# Altium PCB IO_PCB.PcbDoc
Units mm, origin at the board's own origin, x right, y up, seen from the top; angles counter-clockwise.
Board outline 48 x 50.95 mm, 2 copper layers (Top Layer, Bottom Layer); 47 components, 59 nets, 239 pads, 29 vias.
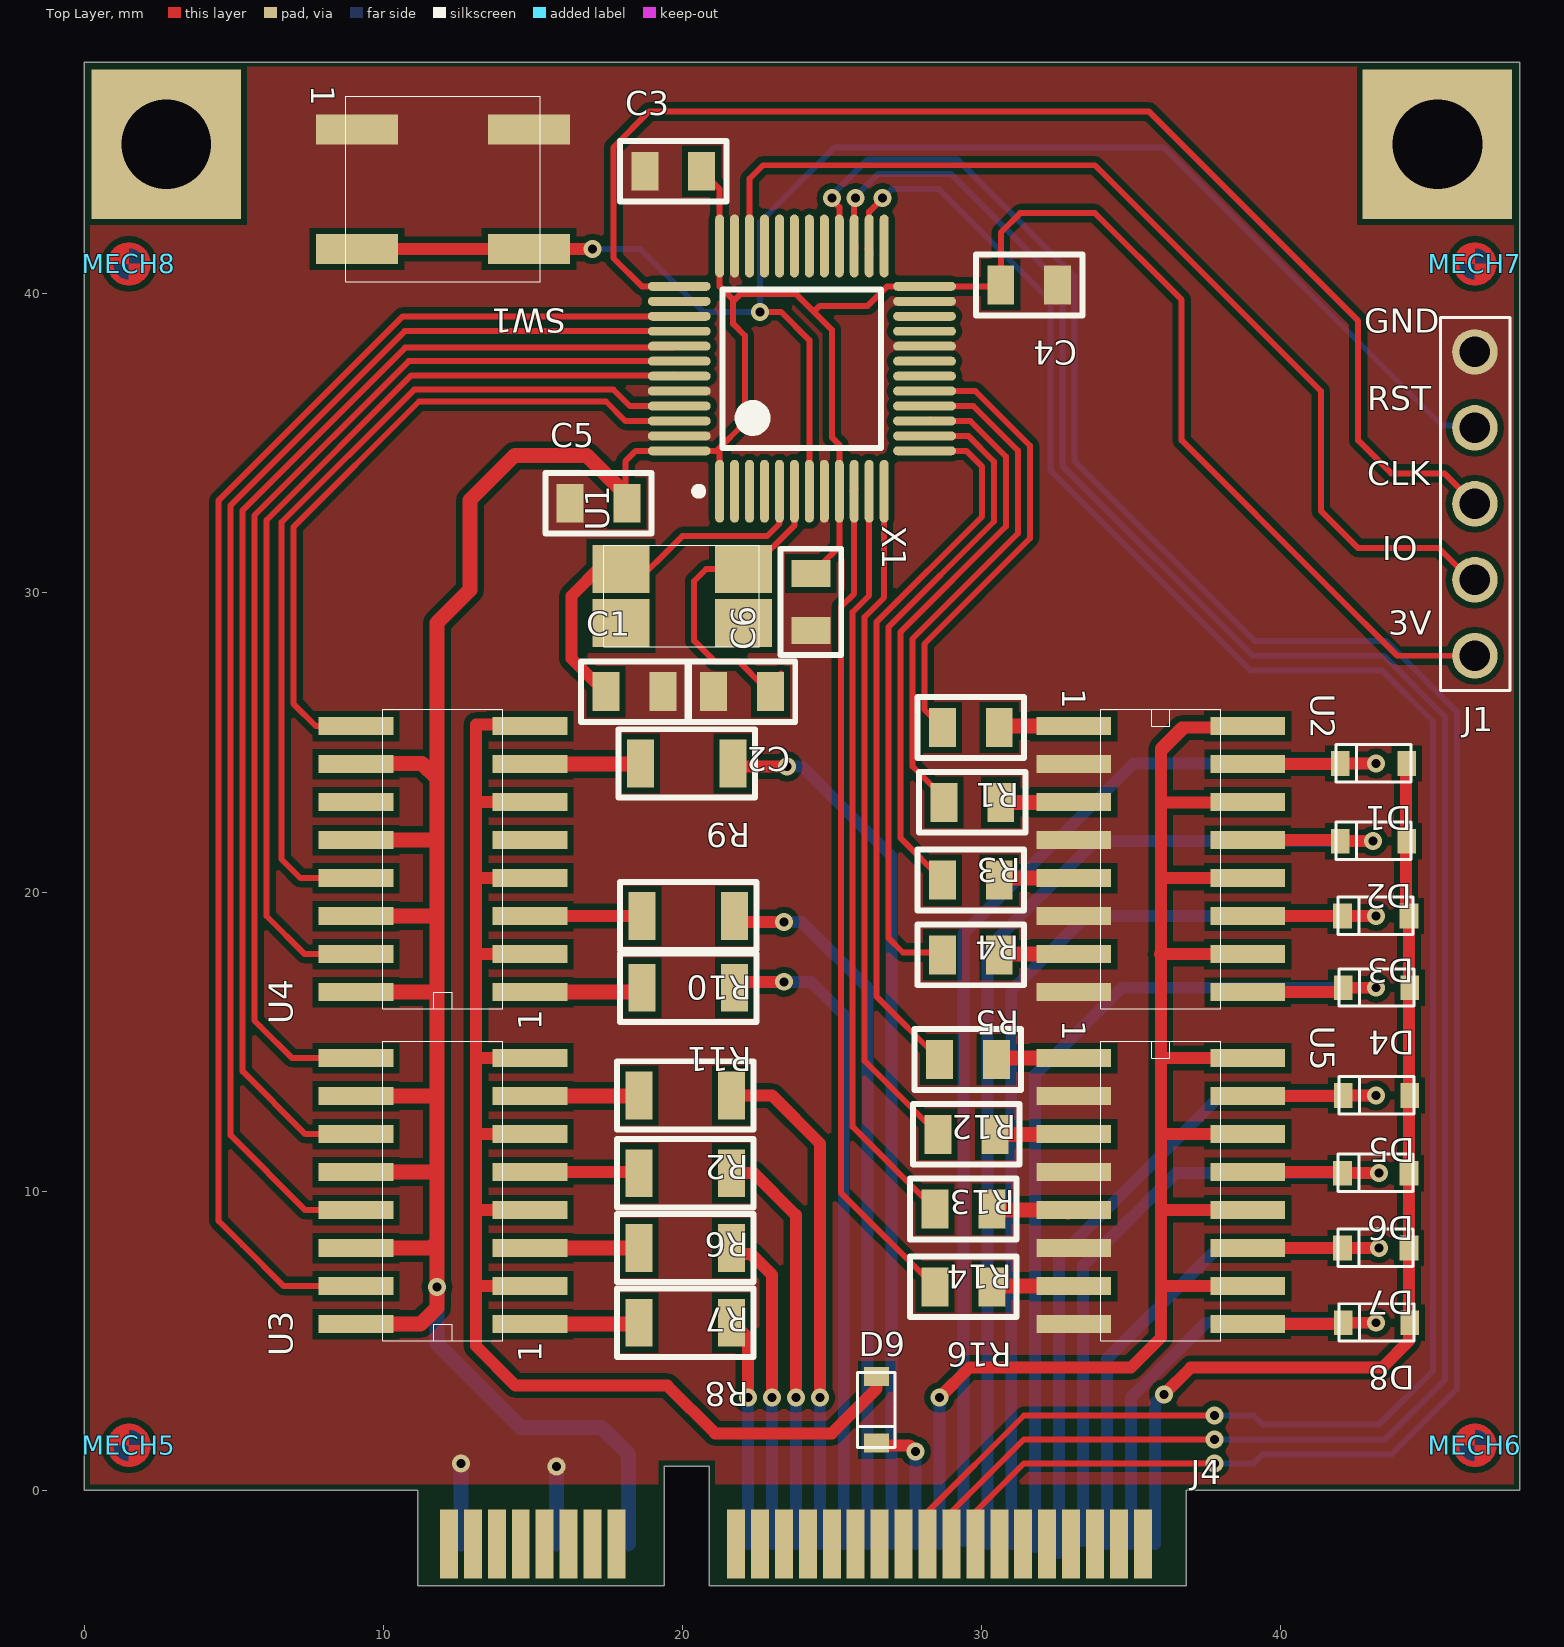
[diagram p0: Top Layer view]
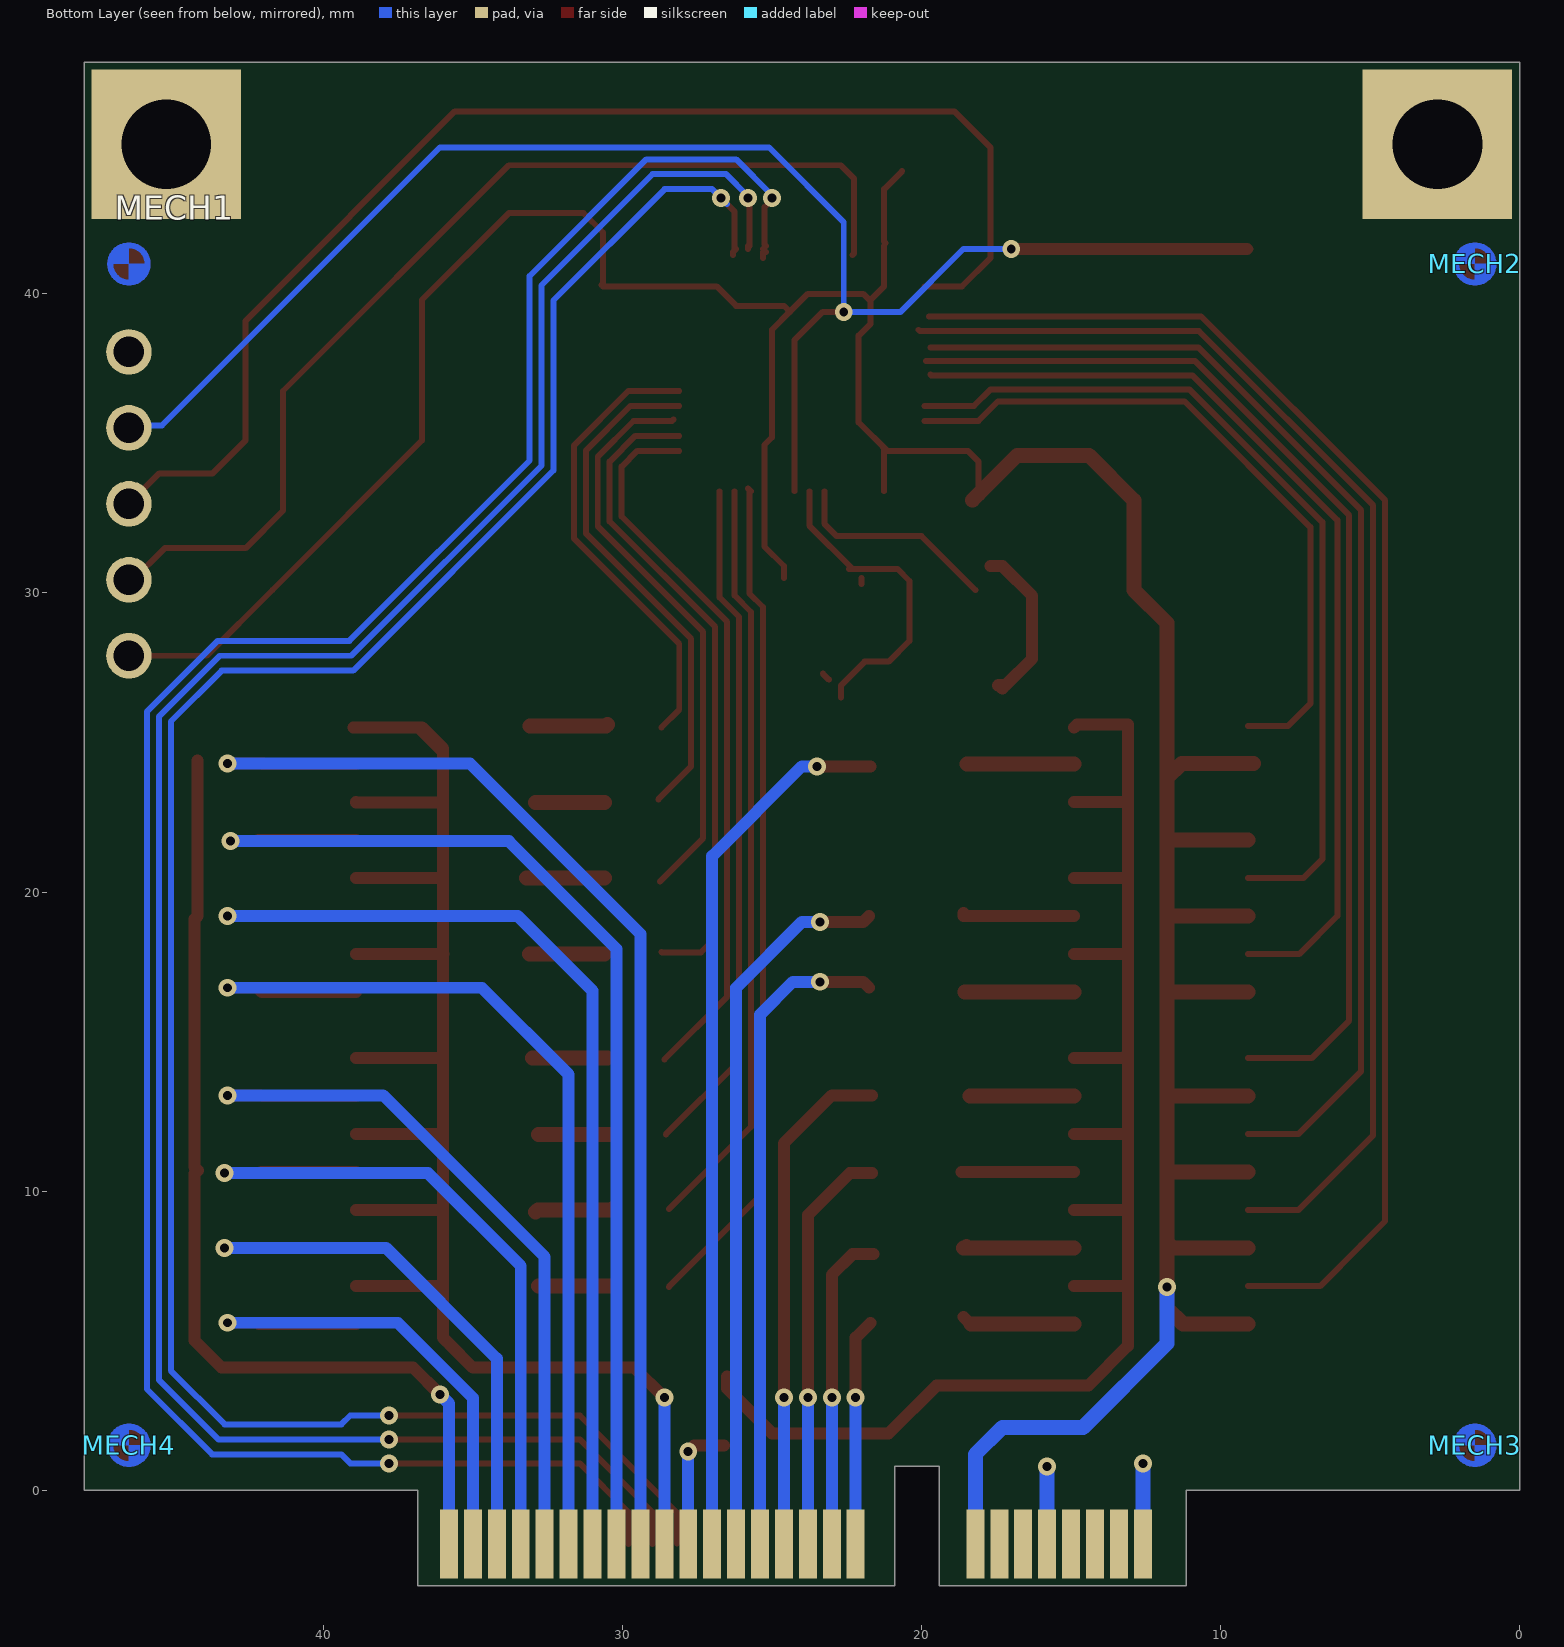
[diagram p1: Bottom Layer view, seen from below]
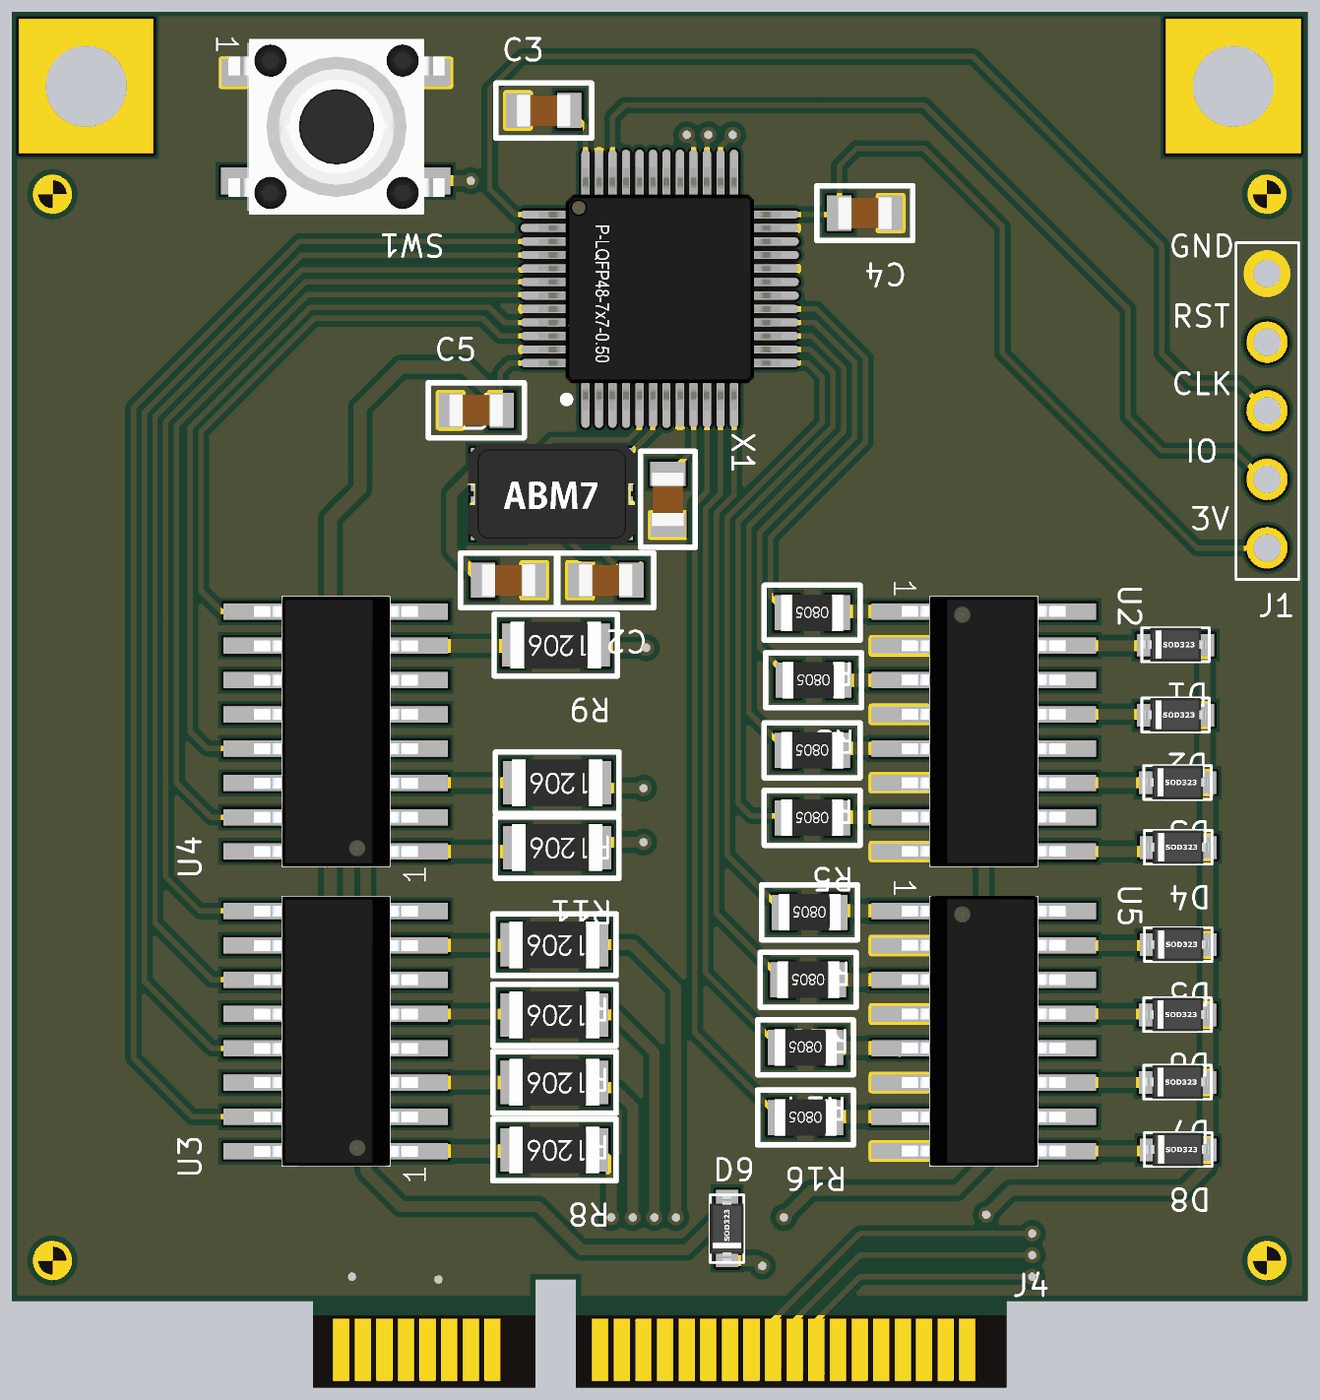
[diagram p2: 3D render of the assembled board from above, using the file's embedded part models]

## Layer stack, top to bottom
Top Solder: solder mask 0.0102, Solder Resist, Dk 3.5
Top Layer: signal copper 0.0356
Dielectric 1: dielectric 0.32, FR-4, Dk 4.8
Bottom Layer: signal copper 0.0356
Bottom Solder: solder mask 0.0102, Solder Resist, Dk 3.5

## Board outline
11.15,-3.2 11.15,0 0,0 0,47.75 48,47.75 48,0 36.85,0 36.85,-3.2 20.9,-3.2 20.9,0.8 19.4,0.8 19.4,-3.2

## Design rules (kind name [scope] priority, off if disabled: settings)
Clearance [All] p1: gap=0.2 ignorepadtopadclearanceinfootprint=FALSE except(0: Arc-Hole Track-Hole SMDPad-Hole THPad-Hole Via-Hole Fill-Hole Poly-Hole Region-Hole Text-Hole)
HoleToHoleClearance [All] p1: gap=0.1 allowstackedmicrovias=TRUE
MinimumSolderMaskSliver [All] p1: minsoldermaskwidth=0.1
PolygonConnect [All] p1: connectstyle=Direct reliefconductorwidth=0.5 reliefentries=4 polygonreliefangle="90 Angle" airgapwidth=0.3
RoutingVias [All] p1: holewidth=0.3 width=0.6 viastyle="Through Hole" minholewidth=0.3 minwidth=0.6 maxholewidth=0.3 maxwidth=0.6
SilkToSilkClearance [All] p1: silktosilkclearance=0.1
SilkToSolderMaskClearance [IsPad] p1: minsilkscreentomaskgap=0.1 clearancetoexposedcopper=TRUE
SolderMaskExpansion [All] p1: expansion=0.102 istentingtop=FALSE
Width [All] p1: maxlimit=2 minlimit=0.2 preferedwidth=0.2
26 further rules are at their usual default settings.

## Classes and differential pairs
net class Undefined: 3V3 24V_IO_1 DIG_IN_1 DIG_IN_2 DIG_IN_3 DIG_IN_4 DIG_IN_5 DIG_IN_6 DIG_IN_7 DIG_OUT_1 DIG_OUT_2 DIG_OUT_3 DIG_OUT_4 DIG_OUT_5 DIG_OUT_6 DIG_OUT_7 DIG_OUT_8 GND GND_IO_1 GND_OUT GP_1 GP_2 GP_3 GP_4 GP_5 GP_6 GP_7 GPO_1 GPO_2 GPO_3 GPO_4 GPO_5 GPO_6 GPO_7 GPO_8 NetR1_1 NetR2_2 NetR3_1 NetR4_1 NetR5_1 NetR6_2 NetR7_2 NetR8_2 NetR9_1 NetR9_2 NetR10_2 NetR11_2 NetR12_1 NetR13_1 NetR14_1 NetR16_1 NetU4_5 NetU4_11
net class SWD: GND SWCLK SWDIO
component class "[01] - CPU": C1 C2 C3 C4 C5 C6 J1 MECH1 MECH2 MECH3 MECH4 MECH5 MECH6 MECH7 MECH8 SW1 U1 X1
component class "[02] - IO": D1 D2 D3 D4 D5 D6 D7 D8 R1 R2 R3 R4 R5 R6 R7 R8 R9 R10 R11 R12 R13 R14 R16 U2 U3 U4 U5
component class "[03] - miniPCI": D9 J4
net class stm_gpio: GP_1 GP_2 GP_3 GP_4 GP_5 GP_6 GP_7 GPO_1 GPO_2 GPO_3 GPO_4 GPO_5 GPO_6 GPO_7 GPO_8

## Components (designator, comment, footprint, x,y, rotation, side; value= is the part's Value field where it differs from the comment)
C1 "18PF" C0805 18.4,26.7 r0 top
C2 "18PF" C0805 22,26.7 r180 top
C3 "4.7µF" C0805 19.7,44.1 r0 top
C4 "10nF" C0805 31.6,40.3 r180 top
C5 "10nF" C0805 17.2,33 r0 top
C6 "10nF" C0805 24.3,29.7 r90 top
D1 "D-1N4148WS" SOD-323 44.225,24.3 r180 top
D2 "D-1N4148WS" SOD-323 44.225,21.7 r180 top
D3 "D-1N4148WS" SOD-323 44.3,19.2 r180 top
D4 "D-1N4148WS" SOD-323 44.325,16.8 r180 top
D5 "D-1N4148WS" SOD-323 44.325,13.2 r180 top
D6 "D-1N4148WS" SOD-323 44.3,10.6 r180 top
D7 "D-1N4148WS" SOD-323 44.3,8.1 r180 top
D8 "D-1N4148WS" SOD-323 44.325,5.6 r180 top
D9 "D-1N4148WS" SOD-323 26.5,3.8 r270 top
J1 "Header" "HEADER 1X5 2.54MM" 46.5,38.06 r270 top
J4 "MINIPCIe" "MINI PCIe" 9,-3.2 r0 top locked
MECH1 "MECH-Fidicuals" T-Fidicuals 46.5,41 r90 bottom
MECH2 "MECH-Fidicuals" T-Fidicuals 1.5,41 r90 bottom
MECH3 "MECH-Fidicuals" T-Fidicuals 1.5,1.5 r90 bottom
MECH4 "MECH-Fidicuals" T-Fidicuals 46.5,1.5 r90 bottom
MECH5 "MECH-Fidicuals" T-Fidicuals 1.5,1.5 r90 top
MECH6 "MECH-Fidicuals" T-Fidicuals 46.5,1.5 r90 top
MECH7 "MECH-Fidicuals" T-Fidicuals 46.5,41 r90 top
MECH8 "MECH-Fidicuals" T-Fidicuals 1.5,41 r90 top
R1 "270R" R0805 29.65,25.5 r180 top
R2 "RES SMD 5.1K" R1206 20.1,13.2 r180 top
R3 "270R" R0805 29.7,23 r180 top
R4 "270R" R0805 29.65,20.4 r180 top
R5 "270R" R0805 29.65,17.9 r180 top
R6 "RES SMD 5.1K" R1206 20.1,10.6 r180 top
R7 "RES SMD 5.1K" R1206 20.1,8.1 r180 top
R8 "RES SMD 5.1K" R1206 20.1,5.6 r180 top
R9 "RES SMD 5.1K" R1206 20.15,24.3 r180 top
R10 "RES SMD 5.1K" R1206 20.2,19.2 r180 top
R11 "RES SMD 5.1K" R1206 20.2,16.8 r180 top
R12 "270R" R0805 29.55,14.4 r180 top
R13 "270R" R0805 29.5,11.9 r180 top
R14 "270R" R0805 29.4,9.4 r180 top
R16 "270R" R0805 29.4,6.8 r180 top
SW1 "Switch_Pushbutton_smd" SW_B3SL-1022P 12,43.5 r180 top
U1 "IC-MC-STM32F101C8T6TR" STM-LQFP48_M 24,37.5 r90 top
U2 "PS2801C-4-F3-A" "U_16_D LONG" 36,21.1 r270 top
U3 "PS2801C-4-F3-A" "U_16_D LONG" 12,10 r90 top
U4 "PS2801C-4-F3-A" "U_16_D LONG" 12,21.1 r90 top
U5 "PS2801C-4-F3-A" "U_16_D LONG" 36,10 r270 top
X1 "ABM7-8.000MHZ" sm_osc_mixed 20,29.9 r0 top

## Footprints (in the part's own frame and the unit in brackets; to place one, negate y for a bottom-side part, rotate by r counter-clockwise, add the part's x,y. Pads: shape width x height; smd on the part's side, far side on the other; paste and mask are expansions set on the pad)
C0805 [mm]
  rect 0.9x1.3 smd: 1(-0.95,0) 2(0.95,0)
  silkscreen extent -1.78,-1.02 1.78,1.02, body extent -1,-0.6 1,0.6, height 0.95
"HEADER 1X5 2.54MM" [mil]
  round 60 hole 40: 1(0,0) 2(100,0) 3(200,0) 4(300,0) 5(400,0)
  silkscreen extent -45,-45 446,46
"MINI PCIe" [mm]
  rect 0.6x2.3 smd paste-0.9: 1(3.2,1.4) 3(4,1.4) 5(4.8,1.4) 7(5.6,1.4) 9(6.4,1.4) 11(7.2,1.4) 13(8,1.4) 15(8.8,1.4) 17(12.8,1.4) 19(13.6,1.4) 21(14.4,1.4) 23(15.2,1.4) 25(16,1.4) 27(16.8,1.4) 29(17.6,1.4) 31(18.4,1.4) 33(19.2,1.4) 35(20,1.4) 37(20.8,1.4) 39(21.6,1.4) 41(22.4,1.4) 43(23.2,1.4) 45(24,1.4) 47(24.8,1.4) 49(25.6,1.4) 51(26.4,1.4)
  rect 0.6x2.3 smd far side paste-0.9: 2(3.6,1.4) 4(4.4,1.4) 6(5.2,1.4) 8(6,1.4) 10(6.8,1.4) 12(7.6,1.4) 14(8.4,1.4) 16(9.2,1.4) 18(13.2,1.4) 20(14,1.4) 22(14.8,1.4) 24(15.6,1.4) 26(16.4,1.4) 28(17.2,1.4) 30(18,1.4) 32(18.8,1.4) 34(19.6,1.4) 36(20.4,1.4) 38(21.2,1.4) 40(22,1.4) 42(22.8,1.4) 44(23.6,1.4) 46(24.4,1.4) 48(25.2,1.4) 50(26,1.4) 52(26.8,1.4)
R0805 [mm]
  rect 0.9x1.3 smd: 1(-0.95,0) 2(0.95,0)
  silkscreen extent -1.78,-1.02 1.78,1.02, body extent -1.15,-0.67 1.15,0.68, height 0.76
R1206 [mm]
  rect 0.9x1.6 smd: 1(-1.55,0) 2(1.55,0)
  silkscreen extent -2.29,-1.14 2.29,1.14, body extent -1.67,-0.86 1.68,0.87, height 0.85
sm_osc_mixed [mm]
  rect 1.9x1.6 smd: 1(-2.05,0.9) 2(2.05,0.9) 3(2.05,-0.9) 4(-2.05,-0.9)
  silkscreen extent -2.62,-1.7 2.58,1.7, body extent -3.1,-1.85 3.1,1.85, height 1.44
SOD-323 [mm]
  rect 0.63x0.83 smd: 1(2.225,0) 2(0,0)
  silkscreen extent -0.13,-0.64 2.37,0.62, body extent -0.13,-0.64 2.37,0.61, height 0.9
STM-LQFP48_M [mm] "QFP, 48-Leads, Body 7x7mm, Pitch 0.5mm, IPC Low Density"
  oval 2.1x0.3 smd mask+0.1: 1(-4.1,2.75) 2(-4.1,2.25) 3(-4.1,1.75) 4(-4.1,1.25) 5(-4.1,0.75) 6(-4.1,0.25) 7(-4.1,-0.25) 8(-4.1,-0.75) 9(-4.1,-1.25) 10(-4.1,-1.75) 11(-4.1,-2.25) 12(-4.1,-2.75) 25(4.1,-2.75) 26(4.1,-2.25) 27(4.1,-1.75) 28(4.1,-1.25) 29(4.1,-0.75) 30(4.1,-0.25) 31(4.1,0.25) 32(4.1,0.75) 33(4.1,1.25) 34(4.1,1.75) 35(4.1,2.25) 36(4.1,2.75)
  oval 0.3x2.1 smd mask+0.1: 13(-2.75,-4.1) 14(-2.25,-4.1) 15(-1.75,-4.1) 16(-1.25,-4.1) 17(-0.75,-4.1) 18(-0.25,-4.1) 19(0.25,-4.1) 20(0.75,-4.1) 21(1.25,-4.1) 22(1.75,-4.1) 23(2.25,-4.1) 24(2.75,-4.1) 37(2.75,4.1) 38(2.25,4.1) 39(1.75,4.1) 40(1.25,4.1) 41(0.75,4.1) 42(0.25,4.1) 43(-0.25,4.1) 44(-0.75,4.1) 45(-1.25,4.1) 46(-1.75,4.1) 47(-2.25,4.1) 48(-2.75,4.1)
  silkscreen extent -4.22,-2.65 2.65,3.57, body extent -4.5,-4.5 4.5,4.5, height 1.5
SW_B3SL-1022P [mm] "SW_B3SL-1022P"
  rect 2.75x1 smd: 1(2.875,-2) 2(-2.875,-2) 3(2.875,2) 4(-2.875,2)
  silkscreen extent -3.25,-3.1 3.25,3.1, body extent -4.02,-3.25 3.98,3.25, height 7
T-Fidicuals [mm] "Fidicuals"
  Top Layer region: 0,-0.625 -0.375,-0.5 -0.625,-0.25 -0.625,0 0,0
  Top Layer region: 0.625,0 0,0 0,0.625 0.375,0.5 0.625,0.25
  Top Layer lines w0.203: 0,-0.625 ccw(c0,0) 0,0.625 ccw(c0,0) 0,-0.625
"U_16_D LONG" [mm] "U_16_D"
  rect 0.6x2.5 smd: 1(-4.445,-2.908) 2(-3.175,-2.908) 3(-1.905,-2.908) 4(-0.635,-2.908) 5(0.635,-2.908) 6(1.905,-2.908) 7(3.175,-2.908) 8(4.445,-2.908) 9(4.445,2.908) 10(3.175,2.908) 11(1.905,2.908) 12(0.635,2.908) 13(-0.635,2.908) 14(-1.905,2.908) 15(-3.175,2.908) 16(-4.445,2.908)
  silkscreen extent -5,-2.01 5,2.01, body extent -5,-3.04 5,3.04, height 1.65

## Part data
C1 C2: library part C-18PF,50V,0805, "MULTICOMP - MC0805N180J500CT - CAP, MLCC, C0G/NP0, 18PF, 50V,0805, REEL"
C3: library part C-4.7UF,16V,0805, "AVX - 0805YC475KAT2A - CAP, MLCC, X7R, 4.7UF, 16V, 0805"
C4 C5 C6: library part C-10NF,16V,0805, "CAP CER 10000PF 16V NP0 0805"
D1 D2 D3 D4 D5 D6 D7 D8 D9: "DIODES INC. - 1N4148WS-7-F - DIODE, SS SWITCH, 75V, 0.2W, SOD323"
J1: library part "CON-Header 1X5 2.54MM", "Header 1X5 2.54"
MECH1 MECH2 MECH3 MECH4 MECH5 MECH6 MECH7 MECH8: "Fidicuals"
R1 R3 R4 R5 R12 R13 R14 R16: library part R-270R,0805, "TE CONNECTIVITY / NEOHM 270R Thin Film"
R2 R6 R7 R8 R9 R10 R11: library part R-5.1K,1206, "RES SMD 5.11K OHM 1% 1/2W 1206"
SW1: "Switch Push Button tactile"
U1: "IC MCU 32BIT 64KB FLASH 48LQFP"
U2 U3 U4 U5: "NEC - PS2801C-4-F3-A - OPTOCOUPLER, 4X TR O/P, SSOP-16"
X1: library part OSC-ABM7-8.000MHZ-D2Y-T, "CRYSTAL 8.0000MHZ 18PF SMD"

## Free pads (board coordinates)
  rect 5x5 hole 3 unplated: MH1(2.75,45) MH2(45.25,45)

## Via types
v1: diameter 0.6, hole 0.3, Top Layer to Bottom Layer, tented both sides, 29 vias

## Nets (pads, with @x,y where several pads share a name; then routed paths per layer and width w, separated by ;. In a path a pad name is that pad's centre, name@x,y a point inside that pad or via, vN(x,y) a via of type N, cw(c..) or ccw(c..) an arc to the next point about the centre after c; other vN are vias at no path point)
3V3: C3.2 C4.2 C5.2 C6.2 J1.5 J4.16 U1.1 U1.9 U1.24 U1.36 U1.48 U3.10 U3.12 U3.14 U3.16 U4.10 U4.12 U4.14 U4.16 | length 131.2
  Top Layer w0.2: C5.2@18.1,33.3 18.1,34.4 18.45,34.75 U1.48 21.15,34.75 22.1,35.7 22.1,38.6 21.7,39 21.7,39.75 21.95,40 23.8,40 24.4,39.4 ; C3.2 21.25,43.5 21.25,41.75 U1.36@21.2,41.7 ; U1.1 21.25,34.85 21.3,34.9 ; U1.36 21.25,40.25 21.7,39.8 ; C6.2@24.6,30.5 24.6,30.9 25.25,31.55 U1.9 25.25,34.951 25,35.201 25,38.8 24.4,39.4 ; C4.2 30.65,42.05 31.3,42.7 33.8,42.7 36.7,39.8 36.7,35.1 41.7,30.1 43.9,27.9 J1.5 ; C4.2@30.7,40.3 30.65,40.25 U1.24 26.85,40.25 26.2,39.6 24.6,39.6 24.4,39.4
  Top Layer w0.5: U4.10@8.9,24.3 11.3,24.3 11.8,23.8 ; U3.16 11.255,5.555 11.8,6.1 v1(11.8,6.8) 11.8,10.6 ; U3.14 11.595,8.095 11.7,8.2 ; U3.12 11.765,10.635 11.8,10.6 ; U3.10 11.8,13.175 ; U4.16 11.8,16.655 ; U4.14 11.705,19.195 11.8,19.1 ; U4.12 11.665,21.735 11.7,21.7 ; C5.2@18.3,33.1 18.1,33.3 16.8,34.6 14.4,34.6 12.9,33.1 12.9,30.1 11.8,29 11.8,23.8 ; 11.8,10.6 11.8,13.175 ; 11.8,13.175 11.8,16.655 ; 11.8,16.655 11.8,19.1 ; 11.8,19.1 11.8,23.8
  Bottom Layer w0.5: v1(11.8,6.8) 11.8,4.9 14.6,2.1 17.3,2.1 18.2,1.2 J4.16
24V_IO_1: J4.34 U2.10 U2.12 U2.14 U2.16 U5.10 U5.12 U5.14 U5.16 | length 57.6
  Top Layer w0.4: v1(28.6,3.1) 29.6,4.1 35,4.1 35.8,4.9 ; 35.85,4.95 36,5.1 36,6.7 ; 35.975,17.925 36,17.925 ; 36.055,14.445 U5.16 ; 36.75,25.45 36,24.7 ; U5.10 36.125,6.825 36,6.7 ; U5.12 36.135,9.365 36,9.5 ; U5.14 36.005,11.905 36,11.9 ; U2.10 36,17.925 ; U2.12 36.065,20.465 36,20.4 ; U2.14 38.903,23 36,23 ; U2.16@39,25.5 36.7,25.5 36,24.8 36,24.7 ; 36,6.7 36,9.5 ; 36,9.5 36,11.9 ; 36,11.9 36,17.925 ; 36,17.925 36,20.4 ; 36,20.4 36,23 ; 36,23 36,24.7
  Bottom Layer w0.4: J4.34 v1(28.6,3.1)
DIG_IN_1: J4.18 R8.1 | length 7.5
  Top Layer w0.4: R8.1@21.7,5.6 22.2,5.1 v1(22.2,3.1)
  Bottom Layer w0.4: J4.18 v1@22.2,3
DIG_IN_2: J4.20 R7.1 | length 10.6
  Top Layer w0.4: R7.1@21.6,7.9 22.3,7.9 23,7.2 v1(23,3.1)
  Bottom Layer w0.4: J4.20 v1@23,3
DIG_IN_3: J4.22 R6.1 | length 13.7
  Top Layer w0.4: R6.1 22.4,10.6 23.8,9.2 v1(23.8,3.1)
  Bottom Layer w0.4: J4.22 v1(23.8,3.1)
DIG_IN_4: J4.24 R2.1 | length 16.9
  Top Layer w0.4: R2.1 23,13.2 24.6,11.6 v1(24.6,3.1)
  Bottom Layer w0.4: J4.24 v1@24.6,3
DIG_IN_5: J4.26 R11.1 | length 21.9
  Top Layer w0.4: R11.1 21.95,17 v1(23.4,17)
  Bottom Layer w0.4: v1(23.4,17) 24.3,17 25.4,15.9 25.4,14.7 J4.26
DIG_IN_6: J4.28 R10.1 | length 24
  Top Layer w0.4: R10.1 21.95,19 v1(23.4,19)
  Bottom Layer w0.4: v1(23.4,19) 24,19 26.2,16.8 J4.28
DIG_IN_7: J4.30 R9.1 | length 29.5
  Top Layer w0.4: R9.1@21.7,24.2 v1(23.5,24.2)
  Bottom Layer w0.4: v1(23.5,24.2) 24,24.2 27,21.2 J4.30
DIG_OUT_1: D1.1 J4.36 U2.15 | length 40.8
  Top Layer w0.4: U2.15 D1.1@41.975,24.275 ; D1.1@42.025,24.275 D1.1@41.975,24.275 ; v1(43.2,24.3) D1.1 D1.1@41.975,24.275
  Bottom Layer w0.4: J4.36@29.4,-1.7 29.4,18.6 35.1,24.3 v1(43.2,24.3)
DIG_OUT_2: D2.1 J4.38 U2.13 | length 38.6
  Top Layer w0.4: U2.13 D2.1@42.165,21.735 ; D2.1 v1(43.1,21.7)
  Bottom Layer w0.4: J4.38 30.2,18.1 33.8,21.7 v1(43.1,21.7)
DIG_OUT_3: D3.1 J4.40 U2.11 | length 36
  Top Layer w0.4: U2.11 D3.1@42.095,19.195 ; D3.1 v1(43.2,19.2)
  Bottom Layer w0.4: J4.40 31,16.7 33.5,19.2 v1(43.2,19.2)
DIG_OUT_4: D4.1 J4.42 U2.9 | length 32.8
  Top Layer w0.4: U2.9 42.055,16.655 42.2,16.8 v1(43.2,16.8)
  Bottom Layer w0.4: J4.42@31.8,-1.9 31.8,13.9 34.7,16.8 v1(43.2,16.8)
DIG_OUT_5: D5.1 J4.44 U5.15 | length 27
  Top Layer w0.4: U5.15 D5.1@42.025,13.175 ; D5.1 v1(43.2,13.2)
  Bottom Layer w0.4: J4.44@32.6,-2.1 32.6,7.8 38,13.2 v1(43.2,13.2)
DIG_OUT_6: D6.1 J4.46 U5.13 | length 24.8
  Top Layer w0.4: U5.13 D6.1@42.065,10.635 ; D6.1 v1(43.3,10.6)
  Bottom Layer w0.4: J4.46@33.4,-1.7 33.4,7.5 36.5,10.6 v1(43.3,10.6)
DIG_OUT_7: D7.1 J4.48 U5.11 | length 21.1
  Top Layer w0.4: U5.11 D7.1@41.995,8.095 ; D7.1 v1(43.3,8.1)
  Bottom Layer w0.4: J4.48 34.2,4.4 37.9,8.1 v1(43.3,8.1)
DIG_OUT_8: D8.1 J4.50 U5.9 | length 18.5
  Top Layer w0.4: U5.9 D8.1@42.145,5.555 ; D8.1 v1(43.2,5.6)
  Bottom Layer w0.4: J4.50 35,3.09 37.51,5.6 v1(43.2,5.6)
GND: C1.2 C2.2 C3.1 C4.1 C5.1 C6.1 J1.1 J4.2 J4.10 SW1.1 SW1.2 U1.8 U1.20 U1.23 U1.35 U1.44 U1.47 U2.2 U2.4 U2.6 U2.8 U5.2 U5.4 U5.6 U5.8 | length 5.3
  Bottom Layer w0.5: J4.2 v1(12.6,0.9) ; J4.10 v1(15.8,0.8)
GND_IO_1: D9.2 U3.2 U3.4 U3.6 U3.8 U4.2 U4.4 U4.6 U4.8 | length 51
  Top Layer w0.4: 13.205,23.005 U4.6 ; U4.8@14.9,25.5 14.8,25.6 13.1,25.6 13.1,20.4 ; U3.2 13.225,6.825 13.1,6.7 ; U3.4 13.165,9.365 13.1,9.3 ; U3.6 13.205,11.905 13.1,11.8 ; U3.8 13.255,14.445 13.1,14.6 ; U4.2 13.125,17.925 13.1,17.9 ; U4.4 13.165,20.465 13.1,20.4 ; D9.2 26.5,3.4 25,1.9 21.1,1.9 19.5,3.5 14.425,3.5 13.1,4.825 13.1,6.7 ; 13.1,6.7 13.1,9.3 ; 13.1,9.3 13.1,11.8 ; 13.1,11.8 13.1,14.6 ; 13.1,14.6 13.1,17.9 ; 13.1,17.9 13.1,20.4
GND_OUT: D1.2 D2.2 D3.2 D4.2 D5.2 D6.2 D7.2 D8.2 J4.52 | length 33.6
  Top Layer w0.4: v1(36.1,3.2) 37,4.1 43.4,4.1 44.3,5 D7.2 44.3,10.59 44.195,10.695 44.3,10.8 44.3,16.8 44.3,19.1 44.2,19.2 D1.2@44.2,24.4
  Bottom Layer w0.4: J4.52 35.8,2.9 v1(36.1,3.2)
GP_1: U1.39 U3.15 | length 47.4
  Top Layer w0.2: U3.15 6.675,6.825 5.3,8.2 4.5,9 4.5,33.094 10.656,39.25 U1.39@19.75,39.25
GP_2: U1.40 U3.13 | length 43.9
  Top Layer w0.2: U3.13 7.401,9.365 4.9,11.866 4.9,32.928 10.722,38.75 U1.40 20.05,38.75 U1.40@20.1,38.8
GP_3: U1.41 U3.11 | length 40.1
  Top Layer w0.2: U3.11 7.401,11.905 5.3,14.006 5.3,32.763 10.737,38.2 U1.41@19.7,38.2
GP_4: U1.42 U3.9 | length 37.1
  Top Layer w0.2: U3.9 6.955,14.445 5.9,15.5 5.7,15.7 5.7,32.597 10.853,37.75 U1.42@19.85,37.75
GP_5: U1.43 U4.15 | length 32.4
  Top Layer w0.2: U4.15 7.375,17.925 6.1,19.2 6.1,32.431 10.944,37.275 19.675,37.275 U1.43@19.7,37.3
GP_6: U1.45 U4.13 | length 29.4
  Top Layer w0.2: U4.13 7.235,20.465 6.6,21.1 6.6,21.3 6.6,32.366 11.034,36.8 17.7,36.8 18.25,36.25 U1.45
GP_7: U1.46 U4.9 | length 23.2
  Top Layer w0.2: U4.9 7.755,25.545 7,26.3 7,32.2 11.2,36.4 17.45,36.4 18.1,35.75 U1.46
GPO_1: R1.2 U1.17 | length 15.4
  Top Layer w0.2: U1.17 29.8,36.75 31.625,34.925 31.625,31.825 28.1,28.3 28.1,26.1 R1.2
GPO_2: R3.2 U1.16 | length 17.3
  Top Layer w0.2: U1.16 29.734,36.25 31.225,34.759 31.225,31.991 27.7,28.466 27.7,24.2 R3.2@28.8,23.1
GPO_3: R4.2 U1.15 | length 19.3
  Top Layer w0.2: U1.15@28.3,35.8 28.35,35.75 29.631,35.75 30.825,34.556 30.825,32.225 27.3,28.7 27.3,21.8 R4.2 R4.2@28.75,20.35
GPO_4: R5.2 U1.14 | length 22.1
  Top Layer w0.2: U1.14 29.566,35.25 30.425,34.391 30.425,32.391 26.9,28.866 26.9,18.459 27.379,17.979 28.679,17.979 R5.2@28.7,18
GPO_5: R12.2 U1.13 | length 24.3
  Top Layer w0.2: U1.13 29.5,34.75 30.025,34.225 30.025,32.556 26.5,29.031 26.5,16.5 R12.2
GPO_6: R13.2 U1.12 | length 22.8
  Top Layer w0.2: U1.12 26.75,29.847 26.1,29.197 26.1,14.35 R13.2
GPO_7: R14.2 U1.11 | length 25.4
  Top Layer w0.2: U1.11 26.25,29.913 25.7,29.363 25.7,12.15 R14.2
GPO_8: R16.2 U1.10 | length 28.2
  Top Layer w0.2: U1.10@25.7,33.4 U1.10@25.8,33.5 ; U1.10 25.75,29.978 25.3,29.528 25.3,24.228 25.3,9.95 R16.2
NetC1_1: C1.1 U1.5 X1.1 | length 12.7
  Top Layer w0.2: X1.1@18.2,30.1 20,31.9 22.834,31.9 23.25,32.316 U1.5
  Top Layer w0.4: C1.1@17.3,26.8 C1.1@17.425,26.925 ; C1.1@17.45,26.9 C1.1@17.425,26.925 ; X1.1@17.7,30.9 17.3,30.9 16.3,29.9 16.3,27.8 17.175,26.925 C1.1@17.425,26.925
NetC2_1: C2.1 U1.6 X1.2 | length 11.2
  Top Layer w0.2: X1.2@22,30.3 X1.2@22,30.5 ; X1.2@22.424,30.8 X1.2@22.3,30.8 ; C2.1@22.7,26.5 22.7,26.9 21.9,27.7 21.1,27.7 20.4,28.4 20.4,30.4 20.8,30.8 X1.2 X1.2@22.3,30.8 ; C2.1@23.1,27.1 C2.1@23.3,27.3 ; U1.6 23.75,32.25 X1.2@22.3,30.8
NetD9_1: D9.1 J4.32 | length 4.4
  Top Layer w0.4: D9.1@26.6,1.5 27.6,1.5 v1(27.8,1.3)
  Bottom Layer w0.4: J4.32 v1(27.8,1.3)
NetR1_1: R1.1 U2.1 | length 2.6
  Top Layer w0.5: R1.1@30.5,25.6 30.555,25.545 U2.1
NetR2_2: R2.2 U3.7 | length 3.5
  Top Layer w0.5: U3.7 R2.2@18.375,13.175
NetR3_1: R3.1 U2.3 | length 2.3
  Top Layer w0.5: R3.1@30.6,23 R3.1 U2.3@32.9,23
NetR4_1: R4.1 U2.5 | length 2.6
  Top Layer w0.5: R4.1@30.6,20.475 U2.5@33.2,20.475
NetR5_1: R5.1 U2.7 | length 2.5
  Top Layer w0.5: R5.1@30.6,17.925 U2.7@33.1,17.925
NetR6_2: R6.2 U3.5 | length 3.8
  Top Layer w0.4: U3.5 R6.2@18.665,10.635
NetR7_2: R7.2 U3.3 | length 3.7
  Top Layer w0.4: R7.2@18.495,8.195 R7.2@18.5,8.2
  Top Layer w0.5: U3.3 R7.2@18.595,8.095
NetR8_2: R8.2 U3.1 | length 3.8
  Top Layer w0.4: R8.2@18.355,5.555 R8.2@18.6,5.8
  Top Layer w0.5: U3.1 R8.2@18.345,5.555
NetR9_2: R9.2 U4.7 | length 3.6
  Top Layer w0.5: U4.7 R9.2@18.475,24.275
NetR10_2: R10.2 U4.3 | length 3.8
  Top Layer w0.4: U4.3 R10.2@18.495,19.195 ; R10.2@18.595,19.195 R10.2@18.495,19.195 ; R10.2@18.6,19.3 R10.2@18.495,19.195
NetR11_2: R11.2 U4.1 | length 3.6
  Top Layer w0.5: U4.1 R11.2@18.555,16.655
NetR12_1: R12.1 U5.1 | length 2.5
  Top Layer w0.5: R12.1@30.5,14.45 U5.1@33,14.45
NetR13_1: R13.1 U5.3 | length 2.4
  Top Layer w0.5: R13.1 U5.3@32.8,11.9
NetR14_1: R14.1 U5.5 | length 2.6
  Top Layer w0.5: R14.1 30.375,9.375 32.825,9.375 U5.5@32.9,9.3
NetR16_1: R16.1 U5.7 | length 2.5
  Top Layer w0.5: R16.1@30.35,6.825 U5.7@32.8,6.825
NRST: J1.2 SW1.3 SW1.4 U1.7 | length 59.3
  Top Layer w0.2: SW1.3@9,41.5 SW1.4@15,41.5 ; v1(22.6,39.4) 23.3,39.4 24.25,38.45 U1.7
  Top Layer w0.4: SW1.3 SW1.4 v1(17,41.5)
  Bottom Layer w0.2: v1(17,41.5) 18.6,41.5 20.7,39.4 v1(22.6,39.4) 22.6,42.4 25.1,44.9 36.1,44.9 45.4,35.6 46.4,35.6 J1.2@46.5,35.5
SPI1_MISO: J4.35 U1.27 | length 74.4
  Top Layer w0.2: U1.27 25.75,43.15 v1(25.8,43.2) ; U1.27@25.8,41.5 U1.27@25.8,41.6 ; J4.35 29,-0.726 31.426,1.7 37.751,1.7 v1(37.8,1.7)
  Bottom Layer w0.2: v1(25.8,43.2) 25.8,43.266 26.534,44 28.993,44 32.707,40.286 32.707,34.259 39.066,27.9 43.466,27.9 45.5,25.866 45.5,3.693 43.507,1.7 v1(37.8,1.7)
SPI1_MOSI: J4.37 U1.28 | length 76.3
  Top Layer w0.2: v1(25,43.2) 25,43.151 25.25,42.901 25.25,41.65 U1.28@25.2,41.6 ; U1.28@25.2,41.4 U1.28@25.3,41.5 ; U1.28@25.3,41.2 U1.28@25.3,41.4 ; J4.37 29.8,-0.726 31.426,0.9 v1(37.8,0.9)
  Bottom Layer w0.2: v1@25,43.249 25,43.3 26.2,44.5 29.2,44.5 33.107,40.593 33.107,34.424 39.131,28.4 43.531,28.4 45.9,26.031 45.9,3.386 43.714,1.2 39.4,1.2 39.1,0.9 v1(37.8,0.9)
SPI1_SCK: J4.33 U1.26 | length 73.6
  Top Layer w0.2: U1.26@26.2,41.5 U1.26@26.25,41.45 ; U1.26@26.3,41.3 26.3,41.4 U1.26@26.25,41.45 ; v1@26.649,43.2 v1(26.7,43.2) 26.25,42.75 U1.26 U1.26@26.25,41.45 ; J4.33@28.175,-1.775 28.175,-0.751 31.426,2.5 v1(37.8,2.5)
  Bottom Layer w0.2: v1@26.5,43 v1(26.7,43.2) 27,43.5 28.586,43.5 32.307,39.779 32.307,34.093 39,27.4 43.4,27.4 45.1,25.7 45.1,4 43.3,2.2 39.4,2.2 39.1,2.5 v1(37.8,2.5)
SWCLK: J1.3 U1.37 | length 43.4
  Top Layer w0.2: U1.37 18.646,40.25 17.7,41.196 17.7,44.9 18.9,46.1 35.6,46.1 42.6,39.1 42.6,35.1 43.7,34 45.48,34 J1.3
SWDIO: J1.4 U1.34 | length 35
  Top Layer w0.2: U1.34@22.3,41.3 22.25,41.35 U1.34 22.25,43.85 22.7,44.3 33.8,44.3 41.35,36.75 41.35,32.75 42.6,31.5 45.3,31.5 J1.4@46.4,30.4
pads on no net: J4.1 J4.3 J4.4 J4.5 J4.6 J4.7 J4.8 J4.9 J4.11 J4.12 J4.13 J4.14 J4.15 J4.17 J4.19 J4.21 J4.23 J4.25 J4.27 J4.29 J4.31 J4.39 J4.41 J4.43 J4.45 J4.47 J4.49 J4.51 U1.2 U1.3 U1.4 U1.18 U1.19 U1.21 U1.22 U1.25 U1.29 U1.30 U1.31 U1.32 U1.33 U1.38 U4.5 U4.11 X1.3 X1.4

## Polygon pours and split planes (outlines as drawn)
GND on Top Layer "Bottom Layer-No Net" (solid, pour order 0): 0.2,47.6 0.2,0.2 11.3,0.2 11.4,0.2 11.7,0.2 14.9,0.2 18.3,0.2 19.2,0.2 19.2,1 20.1,1 21.1,1 21.1,0.2 47.8,0.2 47.8,47.6

## Silkscreen, mask and mechanical layers (free items; w line width, h text height)
Top Overlay:
  text "GND" at 42.8,38.7 h0.8
  text "RST" at 42.9,36.1 h0.8
  text "CLK" at 42.9,33.6 h0.8
  text "IO" at 43.4,31.1 h0.8
  text "3V" at 43.6,28.6 h0.8
Mechanical 1:
  lines w0.1: 0,47.75 48,47.75 48,0 36.85,0 36.85,-3.2 20.9,-3.2 20.9,0.8 19.4,0.8 19.4,-3.2 11.15,-3.2 11.15,0 11.1,0 0,0 0,47.752
  lines w0.254: 0,51.7 0,51.9 ; 0.8,51.533 0,51.8 ; 0.8,52.067 0,51.8 ; 11.149,-8.7 11.149,-8.5 ; 11.949,-8.867 11.149,-8.6 ; 11.949,-8.333 11.149,-8.6 ; 16.86,-5.546 19.4,-5.546 ; 18.6,-5.813 19.4,-5.546 ; 18.6,-5.279 19.4,-5.546 ; 19.4,-5.646 19.4,-5.446 ; 20.446,-8.6 11.149,-8.6 ; 20.9,-5.646 20.9,-5.446 ; 21.18,51.8 0,51.8 ; 21.7,-5.813 20.9,-5.546 ; 21.7,-5.279 20.9,-5.546 ; 23.44,-5.546 20.9,-5.546 ; 26.82,51.8 48,51.8 ; 27.552,-8.6 36.849,-8.6 ; 36.049,-8.867 36.849,-8.6 ; 36.049,-8.333 36.849,-8.6 ; 36.849,-8.7 36.849,-8.5 ; 47.2,51.533 48,51.8 ; 47.2,52.067 48,51.8 ; 48,51.7 48,51.9 ; 50.479,-3.95 50.746,-3.15 ; 50.479,47 50.746,47.8 ; 50.646,-3.15 50.846,-3.15 ; 50.646,47.8 50.846,47.8 ; 50.746,-5.69 50.746,-3.15 ; 50.746,2.59 50.746,0.05 ; 50.746,19.972 50.746,0.05 ; 50.746,27.878 50.746,47.8 ; 51.013,-3.95 50.746,-3.15 ; 51.013,47 50.746,47.8 ; 50.746,0.05 51.013,0.85 50.746,0.05 ; 50.746,0.05 50.479,0.85 50.746,0.05 ; 50.646,0.05 50.846,0.05 50.646,0.05
  text "48 (mm)" at 21.434,51.3 h0.8
  text "47.75 (mm)" at 51.246,20.226 h0.8 r90
  text "3.2 (mm)" at 52.746,-4.449 h0.8 r90
  text "1.5 (mm)" at 17.318,-7.545 h0.8
  text "25.7 (mm)" at 20.7,-9.1 h0.8

## Text inside footprints (layer, text, board x,y; h text height)
SW1: Top Overlay "1" at 7.593,46.968 h0.79 r270
U2: Top Overlay "1" at 32.698,26.815 h0.79 r270
U3: Top Overlay "1" at 15.302,4.285 h0.79 r90
U4: Top Overlay "1" at 15.302,15.385 h0.79 r90
U5: Top Overlay "1" at 32.698,15.715 h0.79 r270